# Altium PCB PCB 0817.PcbDoc (part 1 of 2)
Units mil, origin at the board's own origin, x right, y up, seen from the top; angles counter-clockwise.
Board outline 9370 x 8640 mil, 2 copper layers (Top Layer, Bottom Layer); 60 components, 203 nets, 811 pads, 245 vias.
Unrouted connection lines stored in the file: 129.
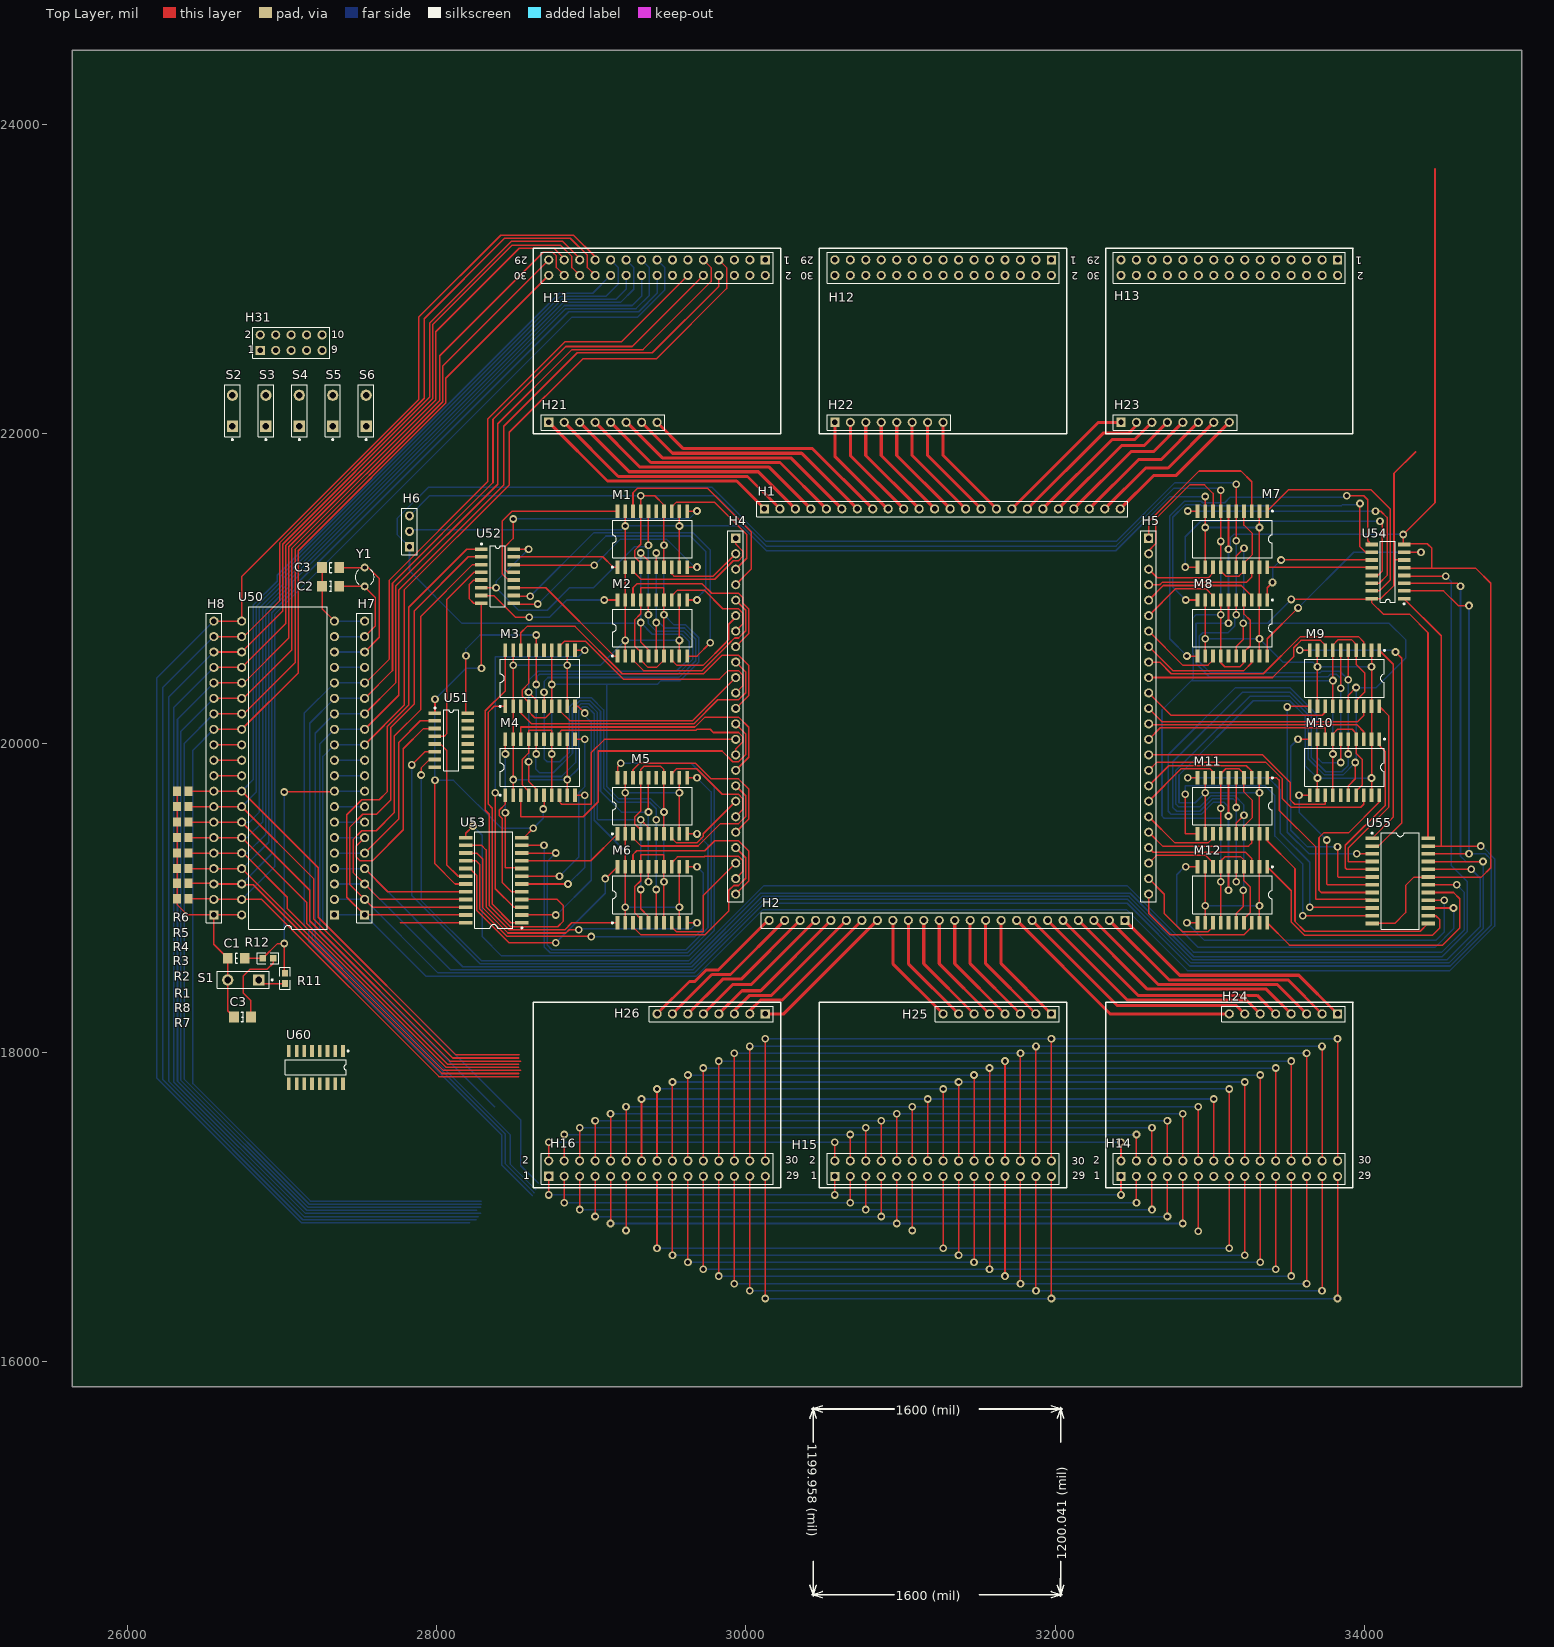
[diagram p0: Top Layer view]
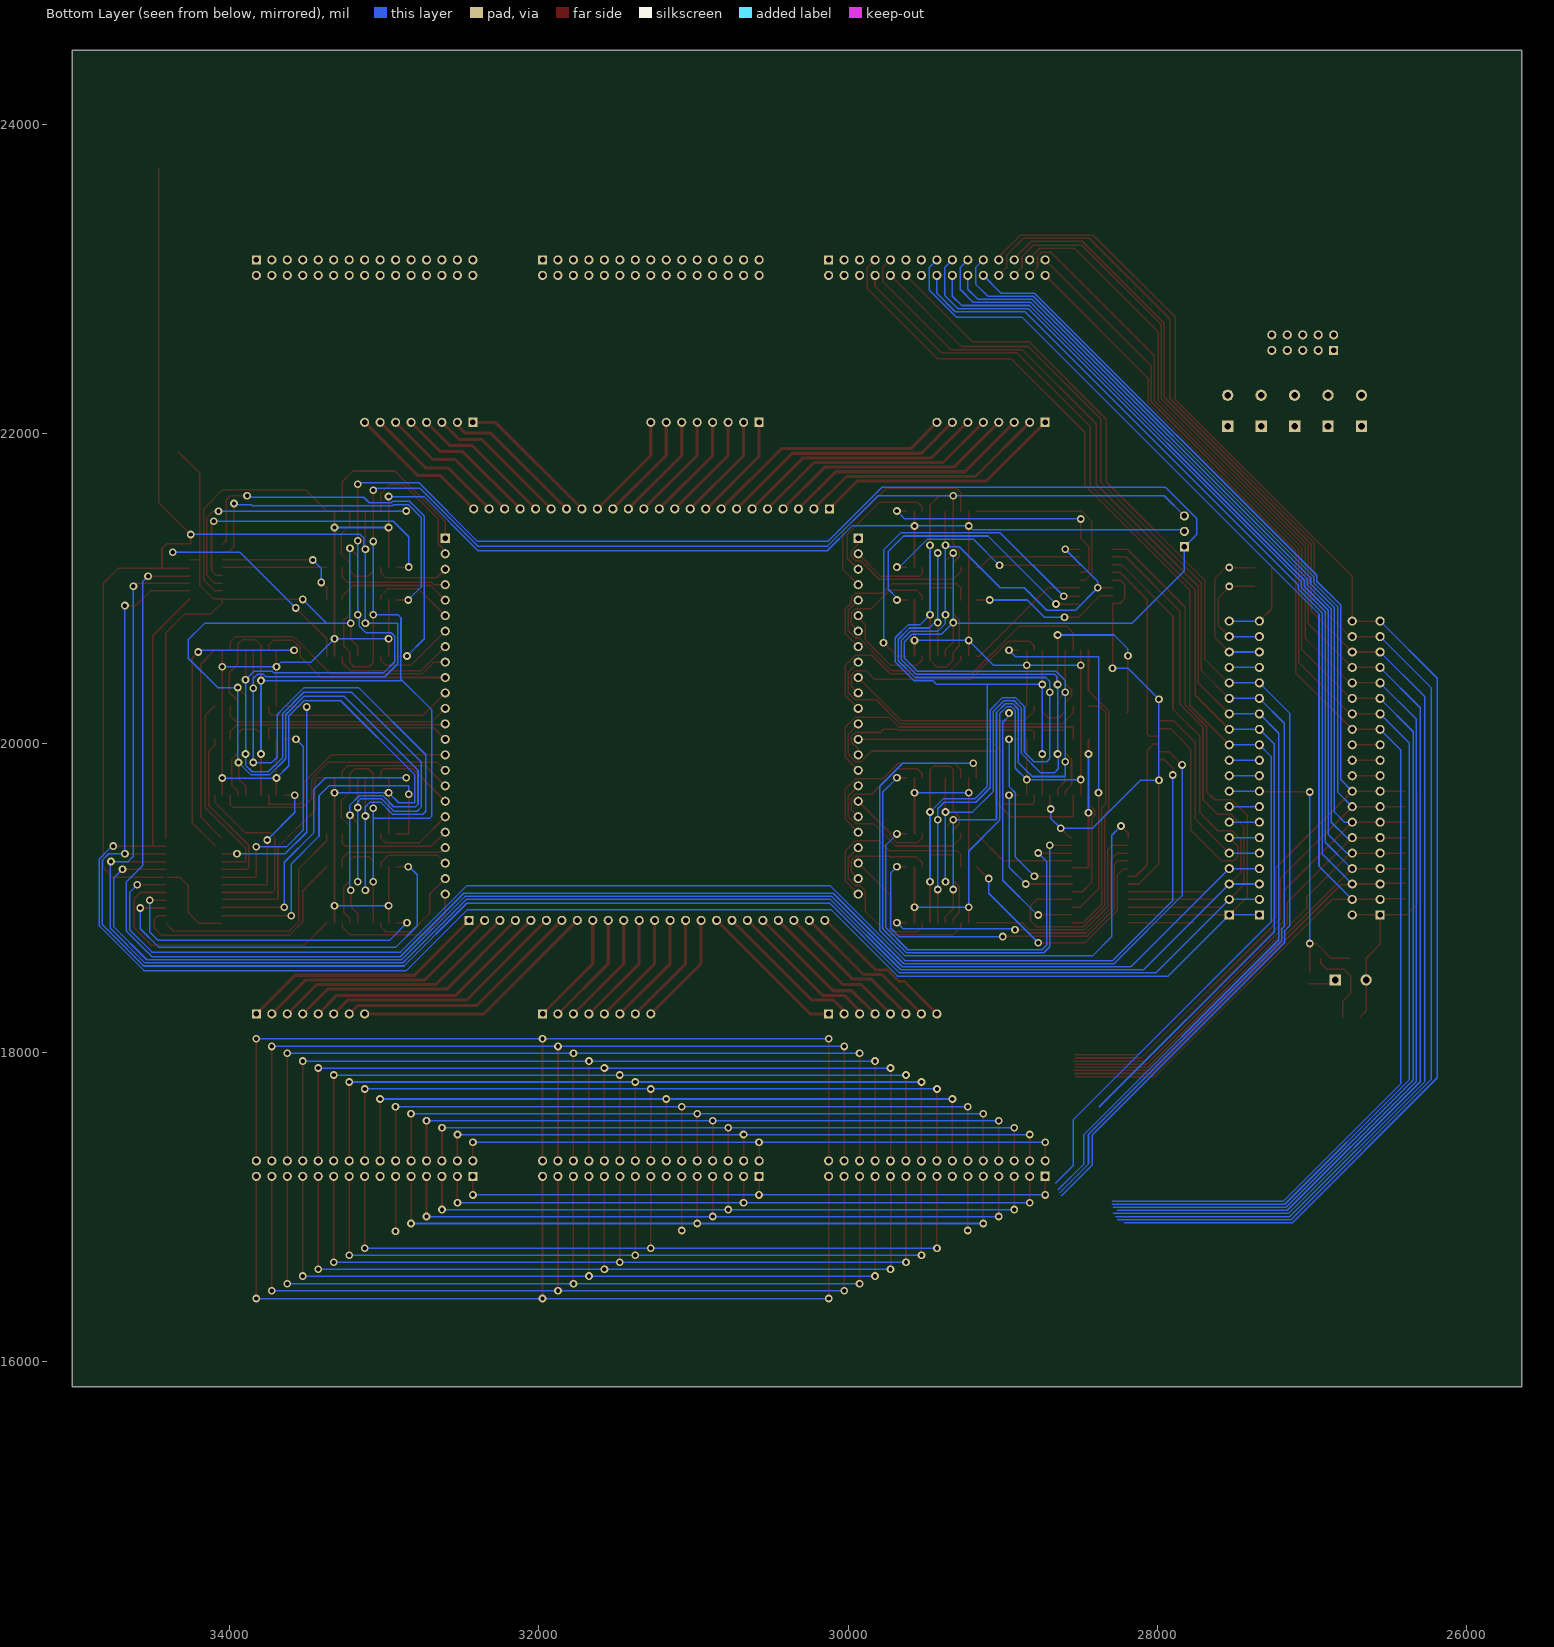
[diagram p1: Bottom Layer view, seen from below]

## Layer stack, top to bottom
Top Layer: signal copper 1.4
Dielectric: dielectric 12.6, FR-4, Dk 4.8
Bottom Layer: signal copper 1.4

## Board outline
25645,15840 25645,24480 35015,24480 35015,15840

## Design rules (kind name [scope] priority, off if disabled: settings)
Clearance Clearance_1 [All] p1: gap=10
Clearance [All] p2: gap=10
PolygonConnect [All] p1: connectstyle=Relief reliefconductorwidth=10 reliefentries=4 polygonreliefangle="90 Angle"
RoutingVias [All] p1: holewidth=28 width=50 viastyle="Through Hole" minholewidth=28 minwidth=50 maxholewidth=28 maxwidth=50
SilkscreenOverComponentPads [All] p1: minsilkscreentomaskgap=10
SolderMaskExpansion [All] p1: expansion=4
Width [All] p1: maxlimit=49.37 minlimit=10 preferedwidth=10
27 further rules are at their usual default settings.

## Components (designator, comment, footprint, x,y, rotation, side; value= is the part's Value field where it differs from the comment)
C1 "Cap Semi" CC3216-1206 26704.88,18610 r0 top
C2 "Cap Semi" CC3216-1206 27315,21015 r180 top
C3 "Cap Semi" CC3216-1206 26745,18230 r180 top
C3 "Cap Semi" CC3216-1206 27315,21135 r0 top
H1 "Header 24" HDR1X24 30120,21515 r0 top
H2 "Header 24" HDR1X24 32450,18855 r180 top
H4 "Header 24" HDR1X24 29933.9,21325 r270 top
H5 "Header 24" HDR1X24 32603.9,21325 r270 top
H6 "Header 3" HDR1X3 27825,21270 r90 top
H7 "Header 20" HDR1X20 27535,18890 r90 top
H8 "Header 20" HDR1X20 26560,18890 r90 top
H11 "Header 15X2" HDR2X15 30125.33,23124.96 r180 top
H12 "Header 15X2" HDR2X15 31975,23124.96 r180 top
H13 "Header 15X2" HDR2X15 33825,23125 r180 top
H14 "Header 15X2" HDR2X15 32425,17200 r0 top
H15 "Header 15X2" HDR2X15 30575,17200 r0 top
H16 "Header 15X2" HDR2X15 28725.25,17200.25 r0 top
H21 "Header 8" HDR1X8 28725.33,22074.96 r0 top
H22 "Header 8" HDR1X8 30575,22074.96 r0 top
H23 "Header 8" HDR1X8 32425,22075 r0 top
H24 "Header 8" HDR1X8 33825,18250 r180 top
H25 "Header 8" HDR1X8 31975,18250 r180 top
H26 "Header 8" HDR1X8 30125.25,18250.25 r180 top
H31 "Header 5X2" HDR2X5 26860,22540 r0 top
M1 "MAX333ACWP" WSO20 29395,21320 r0 top
M2 "MAX333ACWP" WSO20 29395,20745 r0 top
M3 "MAX333ACWP" WSO20 28670,20420 r0 top
M4 "MAX333ACWP" WSO20 28670,19845 r0 top
M5 "MAX333ACWP" WSO20 29395,19595 r0 top
M6 "MAX333ACWP" WSO20 29395,19020 r0 top
M7 "MAX333ACWP" WSO20 33145,21320 r180 top
M8 "MAX333ACWP" WSO20 33145,20745 r180 top
M9 "MAX333ACWP" WSO20 33870,20420 r180 top
M10 "MAX333ACWP" WSO20 33870,19845 r180 top
M11 "MAX333ACWP" WSO20 33145,19595 r180 top
M12 "MAX333ACWP" WSO20 33145,19020 r180 top
R1 "Res Semi" CR2012-0805 26360,18995 r0 top
R2 "Res Semi" CR2012-0805 26360,19095 r0 top
R3 "Res Semi" CR2012-0805 26360,19190 r0 top
R4 "Res Semi" CR2012-0805 26360,19290 r0 top
R5 "Res Semi" CR2012-0805 26360,19390 r0 top
R6 "Res Semi" CR2012-0805 26360,19490 r0 top
R7 "Res Semi" CR2012-0805 26360,19590 r0 top
R8 "Res Semi" CR2012-0805 26360,19690 r0 top
R11 "Res3" C1608-0603 27020,18480 r90 top
R12 "Res3" C1608-0603 26910,18610 r180 top
S1 "SW-PB" SPST-2 26750,18470 r180 top
S2 "SW-PB" SPST-2 26680,22150 r90 top
S3 "SW-PB" SPST-2 26896.25,22150 r90 top
S4 "SW-PB" SPST-2 27112.5,22150 r90 top
S5 "SW-PB" SPST-2 27328.75,22150 r90 top
S6 "SW-PB" SPST-2 27545,22150 r90 top
U50 "AT89C51" 40P6 27040,19840 r90 top
U51 "SN74AHC139D" D016 28095,20020 r270 top
U52 "SN74F138D" D016 28395,21080 r270 top
U53 "DM74LS154WM" M24B 28370,19115 r90 top
U54 "SN74F138D" D016 34150,21110 r90 top
U55 "DM74LS154WM" M24B 34230,19110 r270 top
U60 "SN74F138D" D016 27220,17905 r180 top
Y1 "XTAL" BCY-W2/D3.1 27535,21075 r0 top

## Footprints (in the part's own frame and the unit in brackets; to place one, negate y for a bottom-side part, rotate by r counter-clockwise, add the part's x,y. Pads: shape width x height; smd on the part's side, far side on the other; paste and mask are expansions set on the pad)
40P6 [mm]
  rect 1.5x1.5 hole 0.9: 1(-24.13,-7.62)
  round 1.5 hole 0.9: 2(-21.59,-7.62) 3(-19.05,-7.62) 4(-16.51,-7.62) 5(-13.97,-7.62) 6(-11.43,-7.62) 7(-8.89,-7.62) 8(-6.35,-7.62) 9(-3.81,-7.62) 10(-1.27,-7.62) 11(1.27,-7.62) 12(3.81,-7.62) 13(6.35,-7.62) 14(8.89,-7.62) 15(11.43,-7.62) 16(13.97,-7.62) 17(16.51,-7.62) 18(19.05,-7.62) 19(21.59,-7.62) 20(24.13,-7.62) 21(24.13,7.62) 22(21.59,7.62) 23(19.05,7.62) 24(16.51,7.62) 25(13.97,7.62) 26(11.43,7.62) 27(8.89,7.62) 28(6.35,7.62) 29(3.81,7.62) 30(1.27,7.62) 31(-1.27,7.62) 32(-3.81,7.62) 33(-6.35,7.62) 34(-8.89,7.62) 35(-11.43,7.62) 36(-13.97,7.62) 37(-16.51,7.62) 38(-19.05,7.62) 39(-21.59,7.62) 40(-24.13,7.62)
  silkscreen extent -26.5,-6.45 26.5,6.45
BCY-W2/D3.1 [mm] "Crystal, Thru-Hole; 2 Leads; Body 3.1 x 8.2 mm (Dia.xH)"
  round 1.3 hole 0.7: 1(0,1.55) 2(0,-1.55)
  silkscreen extent -1.55,-1.19 1.55,1.17
C1608-0603 [mm] "Chip Resistor; Body 1.6 x 0.8 mm (LxW typ)"
  rect 1.1x1 smd: 1(-0.85,0) 2(0.85,0)
  silkscreen extent -1.8,-0.9 1.8,0.9
CC3216-1206 [mm] "Chip Capacitor; Body 3.2 x 1.6 mm (LxW typ)"
  rect 1.6x1.8 smd: 1(-1.4,0) 2(1.4,0)
  silkscreen extent -0.11,-0.8 0.16,0.8
CR2012-0805 [mm] "Chip Resistor; Body 2.0 x 1.3 mm (LxW typ)"
  rect 1.3x1.5 smd: 1(-0.95,0) 2(0.95,0)
D016 [mm] "Small Outline; 16 Leads; Body Width 3.9 mm; Pitch 1.27 mm"
  rect 0.6x2.05 smd: 1(-4.445,-2.675) 2(-3.175,-2.675) 3(-1.905,-2.675) 4(-0.635,-2.675) 5(0.635,-2.675) 6(1.905,-2.675) 7(3.175,-2.675) 8(4.445,-2.675) 9(4.445,2.675) 10(3.175,2.675) 11(1.905,2.675) 12(0.635,2.675) 13(-0.635,2.675) 14(-1.905,2.675) 15(-3.175,2.675) 16(-4.445,2.675)
  silkscreen extent -5.42,-2.8 5,1.25
HDR1X3 [mm] "Connector; Header; 3 Position"
  rect 1.5x1.5 hole 0.9: 1(0,0)
  round 1.5 hole 0.9: 2(2.54,0) 3(5.08,0)
  silkscreen extent -1.27,-1.27 6.35,1.27
HDR1X8 [mm] "Connector; Header; 8 Position"
  rect 1.5x1.5 hole 0.9: 1(0,0)
  round 1.5 hole 0.9: 2(2.54,0) 3(5.08,0) 4(7.62,0) 5(10.16,0) 6(12.7,0) 7(15.24,0) 8(17.78,0)
  silkscreen extent -1.27,-1.27 19.05,1.27
HDR1X20 [mm] "Connector; Header; 20 Position"
  rect 1.5x1.5 hole 0.9: 1(0,0)
  round 1.5 hole 0.9: 2(2.54,0) 3(5.08,0) 4(7.62,0) 5(10.16,0) 6(12.7,0) 7(15.24,0) 8(17.78,0) 9(20.32,0) 10(22.86,0) 11(25.4,0) 12(27.94,0) 13(30.48,0) 14(33.02,0) 15(35.56,0) 16(38.1,0) 17(40.64,0) 18(43.18,0) 19(45.72,0) 20(48.26,0)
  silkscreen extent -1.27,-1.27 49.53,1.27
HDR1X24 [mm] "Connector; Header; 24 Position"
  rect 1.5x1.5 hole 0.9: 1(0,0)
  round 1.5 hole 0.9: 2(2.54,0) 3(5.08,0) 4(7.62,0) 5(10.16,0) 6(12.7,0) 7(15.24,0) 8(17.78,0) 9(20.32,0) 10(22.86,0) 11(25.4,0) 12(27.94,0) 13(30.48,0) 14(33.02,0) 15(35.56,0) 16(38.1,0) 17(40.64,0) 18(43.18,0) 19(45.72,0) 20(48.26,0) 21(50.8,0) 22(53.34,0) 23(55.88,0) 24(58.42,0)
  silkscreen extent -1.27,-1.27 59.69,1.27
HDR2X5 [mm] "Connector; Header; 5x2 Position"
  rect 1.5x1.5 hole 0.9: 1(0,0)
  round 1.5 hole 0.9: 2(0,2.54) 3(2.54,0) 4(2.54,2.54) 5(5.08,0) 6(5.08,2.54) 7(7.62,0) 8(7.62,2.54) 9(10.16,0) 10(10.16,2.54)
  silkscreen extent -1.27,-1.27 11.43,3.81
HDR2X15 [mm] "Connector; Header; 15x2 Position"
  rect 1.5x1.5 hole 0.9: 1(0,0)
  round 1.5 hole 0.9: 2(0,2.54) 3(2.54,0) 4(2.54,2.54) 5(5.08,0) 6(5.08,2.54) 7(7.62,0) 8(7.62,2.54) 9(10.16,0) 10(10.16,2.54) 11(12.7,0) 12(12.7,2.54) 13(15.24,0) 14(15.24,2.54) 15(17.78,0) 16(17.78,2.54) 17(20.32,0) 18(20.32,2.54) 19(22.86,0) 20(22.86,2.54) 21(25.4,0) 22(25.4,2.54) 23(27.94,0) 24(27.94,2.54) 25(30.48,0) 26(30.48,2.54) 27(33.02,0) 28(33.02,2.54) 29(35.56,0) 30(35.56,2.54)
  silkscreen extent -1.27,-1.27 36.83,3.81
M24B [mm] "Small Outline; 24 Leads; Body Width 7.5 mm; Pitch 1.27 mm"
  rect 0.6x2.2 smd: 1(-6.985,-4.6) 2(-5.715,-4.6) 3(-4.445,-4.6) 4(-3.175,-4.6) 5(-1.905,-4.6) 6(-0.635,-4.6) 7(0.635,-4.6) 8(1.905,-4.6) 9(3.175,-4.6) 10(4.445,-4.6) 11(5.715,-4.6) 12(6.985,-4.6) 13(6.985,4.6) 14(5.715,4.6) 15(4.445,4.6) 16(3.175,4.6) 17(1.905,4.6) 18(0.635,4.6) 19(-0.635,4.6) 20(-1.905,4.6) 21(-3.175,4.6) 22(-4.445,4.6) 23(-5.715,4.6) 24(-6.985,4.6)
  silkscreen extent -7.96,-4.73 7.93,3.1
SPST-2 [mm] "Circuit Breaker; 2 Leads"
  rect 1.85x1.85 hole 1.1: 1(-2.54,0)
  round 1.85 hole 1.1: 2(2.54,0)
  silkscreen extent -4.89,-1.4 4.28,1.4
WSO20 [mm] "Small Outline; 20 Leads; Body Width 7.5 mm; Pitch 1.27 mm"
  rect 0.6x2.2 smd: 1(-5.715,-4.6) 2(-4.445,-4.6) 3(-3.175,-4.6) 4(-1.905,-4.6) 5(-0.635,-4.6) 6(0.635,-4.6) 7(1.905,-4.6) 8(3.175,-4.6) 9(4.445,-4.6) 10(5.715,-4.6) 11(5.715,4.6) 12(4.445,4.6) 13(3.175,4.6) 14(1.905,4.6) 15(0.635,4.6) 16(-0.635,4.6) 17(-1.905,4.6) 18(-3.175,4.6) 19(-4.445,4.6) 20(-5.715,4.6)
  silkscreen extent -6.69,-4.72 6.53,3.1

## Part data
C1 C2 C3 C3: "Capacitor (Semiconductor SIM Model)"
H1 H2 H4 H5: "Header, 24-Pin"
H6: "Header, 3-Pin"
H7 H8: "Header, 20-Pin"
H11 H12 H13 H14 H15 H16: "Header, 15-Pin, Dual row"
H21 H22 H23 H24 H25 H26: "Header, 8-Pin"
H31: "Header, 5-Pin, Dual row"
M1 M2 M3 M4 M5 M6 M7 M8 M9 M10 M11 M12: "Precision, Quad, SPDT, CMOS Analog Switch"
R1 R2 R3 R4 R5 R6 R7 R8: "Semiconductor Resistor"
R11 R12: "Resistor"
S1 S2 S3 S4 S5 S6: "Switch"
U50: "8-Bit Microcontroller with 4K Fla"
U51: "Dual 2-Line to 4-Line Decoder / Demultiplexer"
U52 U54 U60: "3-Line to 8-Line Decoder / Demultiplexer"
U53 U55: "4-Line to 16-Line Decoder/Demultiplexer"
Y1: "Crystal Oscillator"

## Via types
v1: diameter 50, hole 28, Top Layer to Bottom Layer, 245 vias

## Nets (pads, with @x,y where several pads share a name; then routed paths per layer and width w, separated by ;. In a path a pad name is that pad's centre, name@x,y a point inside that pad or via, vN(x,y) a via of type N, cw(c..) or ccw(c..) an arc to the next point about the centre after c; other vN are vias at no path point)
CS1: H11.11 U60.14
CS2: H12.11 U60.13
CS3: H13.11 U60.12
CS4: H14.11 U60.10 | length 350
  Top Layer w10: v1(32925,16845) H14.11@32925,17195
CS5: H15.11 U60.9 | length 350
  Top Layer w10: v1(31075,16850) H15.11@31075,17200
CS6: H16.11 U60.7 | length 350
  Top Layer w10: v1(29225,16850) H16.11@29225,17200
FRST: H11.14 H12.14 H13.14 H14.14 H15.14 H16.14 H31.9 S6.2 | length 4914.1
  Top Layer w10: H16.14@29325,17300 v1(29325,17700) ; H15.14@31175,17300 v1(31175,17700) ; H14.14@33025,17300 v1(33025,17700)
  Bottom Layer w10: v1@29330,17705 v1(29325,17700) v1(33025,17700) v1@33030,17705
GND: C2.2 C3.1 H7.20 H11.2 H12.2 H13.2 H14.2 H15.2 H16.2 H31.6 H31.8 H31.10 M1.6 M2.6 M3.6 M4.6 M5.6 M6.6 M7.6 M8.6 M9.6 M10.6 M11.6 M12.6 R12.1 S2.1 S3.1 S4.1 S5.1 S6.1 U50.20 U51.1 U51.8 U52.5 U52.8 U53.12 U53.19 U54.5 U54.8 U55.12 U55.19 U60.4 U60.5 U60.8 | length 28157.7
  Top Layer w10: C3.1@26800.12,18230 26800.12,18334.88 26750,18385 26750,18495 26795,18540 26905.43,18540 26943.46,18578.03 R12.1@26943.46,18610 ; C3.1@27259.88,21135 C2.2@27259.88,21015 27260,21014.88 27260,20870 U50.20@27340,20790 ; v1(27989.69,19760) 27989.69,19220.31 28120,19090 U53.19@28188.9,19090 ; U51.1@27990,20195.31 v1(27990,20285) ; v1@28289.69,20485.31 U52.8@28289.69,20905 28240,20905 28210,20935 28210,21025 28240,21055 U52.5@28289.69,21055 ; U53.12@28551.1,19390 28565,19390 v1(28625,19450) ; v1@28695,19580 M4.6@28695,19663.9 ; M3.6@28695,20238.9 v1(28695,20330) ; H16.2@28725,17300 v1(28725,17420) ; M6.6@29420,18838.9 v1(29420,19055) ; M2.6@29420,20563.9 v1(29420,20780) ; M1.6@29420,21138.9 v1(29420,21230) ; H15.2@30575,17300 v1(30575,17420) ; H14.2@32425,17300 v1(32425,17420) ; v1(33120,19050) M12.6@33120,19201.1 ; v1(33120,19530) 33120,19535 33117.5,19537.5 33120,19540 M11.6@33120,19776.1 ; v1(33120,20775) M8.6@33120,20926.1 ; v1(33120,21255) 33120,21260 33117.5,21262.5 33120,21265 M7.6@33120,21501.1 ; v1(33845,19875) M10.6@33845,20026.1 ; v1(33845,20355) 33845,20360 33842.5,20362.5 33845,20365 M9.6@33845,20601.1 ; U55.12@34048.9,18835 34195,18835 34265,18905 34265,19080 34320,19135 U55.19@34399.84,19135 ; U54.5@34260,21130.31 34435,21130.31 ; U55.19@34425,19135 34755,19135 34815,19195 34815,21035 34719.69,21130.31 34435,21130.31 ; 34455,23715 34455,21555 v1(34250,21350) 34250,21290.31 34404.69,21290.31 34435,21260 34435,21130.31
  Bottom Layer w10: U50.20@27340,20790 H7.20@27535,20790 ; v1(28290,20485) 28190,20485 v1(27990,20285) 27989.69,20284.69 v1(27989.69,19760) 28110,19760 28420,19450 v1(28625,19450) 28690,19515 v1(28690,19575) ; v1(28725,17420) v1(32425,17420) ; v1(29420,19055) v1(29420,19505) 29420,19576.72 29378.36,19618.36 29173.36,19618.36 29080,19711.72 29080,20215.32 29000.32,20295 28917.48,20295 28858.9,20236.42 28858.9,19942.18 28796.72,19880 28715,19880 28695,19900 v1(28695,20330) 28695,20400 28720,20425 29566.57,20425 29675,20533.43 29675,20673.14 29603.14,20745 29475,20745 29440,20780 v1(29420,20780) v1(29420,21230) ; v1(33120,19050) v1(33120,19530) 33120,19590 33090,19620 33023.14,19620 32943.14,19540 32750,19540 32730,19560 32730,19925 33165,20360 33516.42,20360 33675,20201.42 33675,20200 33690,20185 33690,19910 33725,19875 v1(33845,19875) v1(33845,20355) 33845,20420 33820,20445 33778.43,20445 33763.43,20430 32995,20430 32911.1,20513.9 32911.1,20588.75 32910,20589.85 32910,20775 v1(33120,20775) v1(33120,21255) ; v1@33120,21265 v1(33120,21255) ; v1(34250,21350) 33153.43,21350 33130,21326.57 33130,21265 v1(33120,21255)
IN1: H1.1 H21.1 | length 1626.6
  Top Layer w20: H21.1@28725.33,22074.96 29105.29,21695 29940,21695 H1.1@30120,21515
IN2: H1.2 H21.2 | length 1626.6
  Top Layer w20: H21.2@28825.33,22074.96 29175.29,21725 30010,21725 H1.2@30220,21515
IN3: H1.3 H21.3 | length 1626.6
  Top Layer w20: H21.3@28925.33,22074.96 29245.29,21755 30080,21755 H1.3@30320,21515
IN4: H1.4 H21.4 | length 1626.6
  Top Layer w20: H21.4@29025.33,22074.96 29315.29,21785 30150,21785 H1.4@30420,21515
IN5: H1.5 H21.5 | length 1626.6
  Top Layer w20: H21.5@29125.33,22074.96 29385.29,21815 30220,21815 H1.5@30520,21515
IN6: H1.6 H21.6 | length 1626.6
  Top Layer w20: H21.6@29225.33,22074.96 29230.04,22074.96 29460,21845 30290,21845 H1.6@30620,21515
IN7: H1.7 H21.7 | length 1626.6
  Top Layer w20: H21.7@29325.33,22074.96 29525.29,21875 30360,21875 H1.7@30720,21515
IN8: H1.8 H21.8 | length 1626.6
  Top Layer w20: H21.8@29425.33,22074.96 29595.29,21905 30430,21905 H1.8@30820,21515
IN9: H1.9 H22.1 | length 694.6
  Top Layer w20: H22.1@30575,22074.96 30575,21855 30900,21530 H1.9@30900,21515
IN10: H1.10 H22.2 | length 702.9
  Top Layer w20: H22.2@30675,22074.96 30675,21860 H1.10@31020,21515
IN11: H1.11 H22.3 | length 702.9
  Top Layer w20: H22.3@30775,22074.96 30775,21860 H1.11@31120,21515
IN12: H1.12 H22.4 | length 702.9
  Top Layer w20: H22.4@30875,22074.96 30875,21860 H1.12@31220,21515
IN13: H1.13 H22.5 | length 702.9
  Top Layer w20: H22.5@30975,22074.96 30975,21860 H1.13@31320,21515
IN14: H1.14 H22.6 | length 702.9
  Top Layer w20: H22.6@31075,22074.96 31075,21860 H1.14@31420,21515
IN15: H1.15 H22.7 | length 702.9
  Top Layer w20: H22.7@31175,22074.96 31175,21860 H1.15@31520,21515
IN16: H1.16 H22.8 | length 702.9
  Top Layer w20: H22.8@31275,22074.96 31275,21860 H1.16@31620,21515
IN17: H1.17 H23.1 | length 937
  Top Layer w20: H1.17@31720,21515 32280,22075 H23.1@32425,22075
IN18: H1.18 H23.2 | length 948.7
  Top Layer w20: H1.18@31820,21515 32310,22005 32475,22005 32525,22055 H23.2@32525,22075
IN19: H1.19 H23.3 | length 937
  Top Layer w20: H1.19@31920,21515 32370,21965 32515,21965 H23.3@32625,22075
IN20: H1.20 H23.4 | length 937
  Top Layer w20: H1.20@32020,21515 32430,21925 32575,21925 H23.4@32725,22075
IN21: H1.21 H23.5 | length 937
  Top Layer w20: H1.21@32120,21515 32490,21885 32635,21885 H23.5@32825,22075
IN22: H1.22 H23.6 | length 937
  Top Layer w20: H1.22@32220,21515 32540,21835 32685,21835 H23.6@32925,22075
IN23: H1.23 H23.7 | length 937
  Top Layer w20: H1.23@32320,21515 32585,21780 32730,21780 H23.7@33025,22075
IN24: H1.24 H23.8 | length 937
  Top Layer w20: H1.24@32420,21515 32635,21730 32780,21730 H23.8@33125,22075
IN25: H2.1 H24.1 | length 1625.6
  Top Layer w20: H2.1@32450,18855 32805,18500 33575,18500 H24.1@33825,18250
IN26: H2.2 H24.2 | length 1625.6
  Top Layer w20: H2.2@32350,18855 32735,18470 33505,18470 H24.2@33725,18250
IN27: H2.3 H24.3 | length 1625.6
  Top Layer w20: H2.3@32250,18855 32665,18440 33435,18440 H24.3@33625,18250
IN28: H2.4 H24.4 | length 1625.6
  Top Layer w20: H2.4@32150,18855 32595,18410 33365,18410 H24.4@33525,18250
IN29: H2.5 H24.5 | length 1625.6
  Top Layer w20: H2.5@32050,18855 32535,18370 33305,18370 H24.5@33425,18250
IN30: H2.6 H24.6 | length 1625.6
  Top Layer w20: H2.6@31950,18855 32465,18340 33235,18340 H24.6@33325,18250
IN31: H2.7 H24.7 | length 1625.6
  Top Layer w20: H2.7@31850,18855 32400,18305 33170,18305 H24.7@33225,18250
IN32: H2.8 H24.8 | length 1625.6
  Top Layer w20: H2.8@31750,18855 32355,18250 H24.8@33125,18250
IN33: H2.9 H25.1 | length 739.6
  Top Layer w20: H2.9@31650,18855 31650,18575 H25.1@31975,18250
IN34: H2.10 H25.2 | length 739.6
  Top Layer w20: H2.10@31550,18855 31550,18575 H25.2@31875,18250
IN35: H2.11 H25.3 | length 739.6
  Top Layer w20: H2.11@31450,18855 31450,18575 H25.3@31775,18250
IN36: H2.12 H25.4 | length 739.6
  Top Layer w20: H2.12@31350,18855 31350,18575 H25.4@31675,18250
IN37: H2.13 H25.5 | length 739.6
  Top Layer w20: H2.13@31250,18855 31250,18575 H25.5@31575,18250
IN38: H2.14 H25.6 | length 739.6
  Top Layer w20: H2.14@31150,18855 31150,18575 H25.6@31475,18250
IN39: H2.15 H25.7 | length 739.6
  Top Layer w20: H2.15@31050,18855 31050,18575 H25.7@31375,18250
IN40: H2.16 H25.8 | length 739.6
  Top Layer w20: H2.16@30950,18855 30950,18575 H25.8@31275,18250
IN41: H2.17 H26.1 | length 975.2
  Top Layer w20: H26.1@30125.25,18250.25 30245.25,18250.25 H2.17@30850,18855
IN42: H2.18 H26.2 | length 987
  Top Layer w20: H26.2@30025.25,18250.25 30025.25,18270.25 30095,18340 30235,18340 H2.18@30750,18855
IN43: H2.19 H26.3 | length 987
  Top Layer w20: H26.3@29925.25,18250.25 29925.25,18270.25 30025,18370 30165,18370 H2.19@30650,18855
IN44: H2.20 H26.4 | length 975.2
  Top Layer w20: H26.4@29825.25,18250.25 29975,18400 30095,18400 H2.20@30550,18855
IN45: H2.21 H26.5 | length 975.2
  Top Layer w20: H26.5@29725.25,18250.25 29915,18440 30035,18440 H2.21@30450,18855
IN46: H2.22 H26.6 | length 975.2
  Top Layer w20: H26.6@29625.25,18250.25 29850,18475 29970,18475 H2.22@30350,18855
IN47: H2.23 H26.7 | length 975.2
  Top Layer w20: H26.7@29525.25,18250.25 29780,18505 29900,18505 H2.23@30250,18855
IN48: H2.24 H26.8 | length 973.8
  Top Layer w20: H26.8@29425.25,18250.25 29635,18460 29670,18460 29745,18535 29822.57,18535 30145,18857.43 H2.24@30147.57,18857.43
NetH4_1: H4.1 M1.3 | length 953.6
  Top Layer w10: M1.3@29270,21138.9 29270,21112.57 29321.98,21060.59 29797.77,21060.59 29917.65,21180.47 29952.34,21180.47 29978.43,21206.56 29978.43,21243.44 29933.9,21287.97 H4.1@29933.9,21325
NetH4_2: H4.2 M1.8 | length 523.6
  Top Layer w10: M1.8@29520,21138.9 29520,21095 29534.41,21080.59 29789.49,21080.59 H4.2@29933.9,21225
NetH4_3: H4.3 M1.13 | length 865.8
  Top Layer w10: M1.13@29520,21501.1 29520,21527.43 29551.98,21559.41 29795.59,21559.41 30005,21350 30005,21196.1 H4.3@29933.9,21125
NetH4_4: H4.4 M1.18 | length 1396.3
  Top Layer w10: M1.18@29270,21501.1 29270,21620 29300,21650 29750,21650 30035,21365 30035,21126.1 H4.4@29933.9,21025
NetH4_5: H4.5 M2.3 | length 1115.6
  Top Layer w10: M2.3@29270,20563.9 29270,20537.57 29337.57,20470 29718.28,20470 29889.37,20641.09 29889.37,20643.44 29926.4,20680.47 29952.34,20680.47 29998.43,20726.56 29998.43,20860.47 H4.5@29933.9,20925
NetH4_6: H4.6 M2.8 | length 650.9
  Top Layer w10: M2.8@29520,20563.9 29520,20537.57 29551.98,20505.59 29725.59,20505.59 29869.37,20649.37 29869.37,20651.73 29889.37,20671.73 29889.37,20769.53 29933.9,20814.06 H4.6@29933.9,20825
NetH4_7: H4.7 M2.13 | length 697.9
  Top Layer w10: M2.13@29520,20926.1 29520,20952.43 29557.57,20990 29730,20990 29850.47,20869.53 29952.34,20869.53 29978.43,20843.44 29978.43,20769.53 H4.7@29933.9,20725
NetH4_8: H4.8 M2.18 | length 1203.6
  Top Layer w10: M2.18@29270,20926.1 29270,21005 29295,21030 29718.28,21030 29778.76,20969.53 29952.34,20969.53 29978.43,20943.44 29978.43,20908.76 30018.43,20868.76 30018.43,20709.53 H4.8@29933.9,20625
NetH4_9: H4.9 M3.3 | length 1835
  Top Layer w10: M3.3@28545,20238.9 28545,20195 28615,20125 29662.18,20125 29817.65,20280.47 29952.34,20280.47 29998.43,20326.56 29998.43,20460.47 H4.9@29933.9,20525
NetH4_10: H4.10 M3.8 | length 1309.2
  Top Layer w10: M3.8@28795,20238.9 28795,20212.57 28862.57,20145 29653.9,20145 H4.10@29933.9,20425
NetH4_11: H4.11 M3.13 | length 1494.5
  Top Layer w10: M3.13@28795,20601.1 28795,20627.43 28826.98,20659.41 28962.31,20659.41 29206.72,20415 29829.76,20415 29884.28,20469.53 29952.34,20469.53 29978.43,20443.44 29978.43,20369.53 H4.11@29933.9,20325
NetH4_12: H4.12 M3.18 | length 2120.6
  Top Layer w10: M3.18@28545,20601.1 28545,20715 28585,20755 28895,20755 29200,20450 29726.57,20450 29846.1,20569.53 29952.34,20569.53 30018.43,20503.44 30018.43,20309.53 H4.12@29933.9,20225
NetH4_13: H4.13 M4.3 | length 2233.7
  Top Layer w10: M4.3@28545,19663.9 28545,19525 28948.28,19525 29045,19621.72 29045,19950 29845.93,19950 29915.45,19880.47 29952.34,19880.47 29998.43,19926.56 29998.43,20060.47 H4.13@29933.9,20125
NetH4_14: H4.14 M4.8 | length 1558.7
  Top Layer w10: M4.8@28795,19663.9 28795,19620 28809.41,19605.59 29000.59,19605.59 29000.59,19940.59 29085,20025 H4.14@29933.9,20025
NetH4_15: H4.15 M4.13 | length 1391.8
  Top Layer w10: M4.13@28795,20026.1 28795,20070 28810,20085 29678.75,20085 29683.75,20090 29768.9,20090 29789.37,20069.53 29952.34,20069.53 29978.43,20043.44 29978.43,20006.56 29933.9,19962.03 H4.15@29933.9,19925
NetH4_16: H4.16 M4.18 | length 1919.9
  Top Layer w10: M4.18@28545,20026.1 28545,20105 29670.47,20105 29734.99,20169.53 29952.34,20169.53 30018.43,20103.44 30018.43,19909.53 H4.16@29933.9,19825
NetH4_17: H4.17 M5.3 | length 1080.6
  Top Layer w10: M5.3@29270,19413.9 29270,19387.57 29321.98,19335.59 29690.44,19335.59 29835.33,19480.47 29952.34,19480.47 29998.43,19526.56 29998.43,19660.47 H4.17@29933.9,19725
NetH4_18: H4.18 M5.8 | length 575.4
  Top Layer w10: M5.8@29520,19413.9 29520,19387.57 29551.98,19355.59 29682.16,19355.59 29723.9,19397.33 29723.9,19415 H4.18@29933.9,19625
NetH4_19: H4.19 M5.13 | length 714
  Top Layer w10: M5.13@29520,19776.1 29520,19802.43 29551.98,19834.41 29682.16,19834.41 29847.04,19669.53 29952.34,19669.53 29978.43,19643.44 29978.43,19569.53 H4.19@29933.9,19525
NetH4_20: H4.20 M5.18 | length 1200.3
  Top Layer w10: M5.18@29270,19776.1 29270,19828.28 29311.72,19870 29674.85,19870 29775.33,19769.53 29952.34,19769.53 30018.43,19703.44 30018.43,19509.53 H4.20@29933.9,19425
NetH4_21: H4.21 M6.3 | length 1230.9
  Top Layer w10: M6.3@29270,18838.9 29270,18812.57 29321.98,18760.59 29733.88,18760.59 29889.37,18916.09 29889.37,19049.07 29920.77,19080.47 29952.34,19080.47 29998.43,19126.56 29998.43,19260.47 H4.21@29933.9,19325
NetH4_22: H4.22 M6.8 | length 775.9
  Top Layer w10: M6.8@29520,18838.9 29520,18812.57 29551.98,18780.59 29725.59,18780.59 29725.59,19016.69 H4.22@29933.9,19225
NetH4_23: H4.23 M6.13 | length 649.9
  Top Layer w10: M6.13@29520,19201.1 29520,19227.43 29557.57,19265 29730,19265 29734.53,19269.53 29952.34,19269.53 29978.43,19243.44 29978.43,19169.53 H4.23@29933.9,19125
NetH4_24: H4.24 M6.18 | length 1205.2
  Top Layer w10: M6.18@29270,19201.1 29270,19280 29295,19305 29733.76,19305 29798.28,19369.53 29952.34,19369.53 30018.43,19303.44 30018.43,19109.53 H4.24@29933.9,19025
NetH5_1: H5.1 M7.3 | length 1128
  Top Layer w10: H5.1@32603.9,21325 32603.9,21433.9 32930,21760 33200,21760 33270,21690 M7.3@33270,21501.1
NetH5_2: H5.2 M7.8 | length 842.9
  Top Layer w10: H5.2@32603.9,21225 32603.9,21244.73 32648.43,21289.26 32648.43,21450.14 32868.28,21670 32965,21670 33020,21615 M7.8@33020,21501.1
NetH5_3: H5.3 M7.13 | length 490.2
  Top Layer w10: H5.3@32603.9,21125 32658.9,21070 32990,21070 33020,21100 M7.13@33020,21138.9
NetH5_4: H5.4 M7.18 | length 750.7
  Top Layer w10: H5.4@32603.9,21025 32675.61,21025 32690.61,21040 33235,21040 33270,21075 M7.18@33270,21138.9
NetH5_5: H5.5 M8.3 | length 759.8
  Top Layer w10: H5.5@32603.9,20925 32698.9,21020 33202.43,21020 33270,20952.43 M8.3@33270,20926.1
NetH5_6: H5.6 M8.8 | length 534.6
  Top Layer w10: H5.6@32603.9,20825 32778.9,21000 32972.43,21000 33020,20952.43 M8.8@33020,20926.1
NetH5_7: H5.7 M8.13 | length 546.6
  Top Layer w10: H5.7@32603.9,20725 32823.31,20505.59 32988.02,20505.59 33020,20537.57 M8.13@33020,20563.9
NetH5_8: H5.8 M8.18 | length 794.9
  Top Layer w10: H5.8@32603.9,20625 32758.9,20470 33220,20470 33270,20520 M8.18@33270,20563.9
NetH5_9: H5.9 M9.3 | length 1590
  Top Layer w10: H5.9@32603.9,20525 32675.61,20525 32750.61,20450 33345.15,20450 33585.15,20690 33960,20690 33995,20655 M9.3@33995,20601.1
NetH5_10: H5.10 M9.8 | length 1320
  Top Layer w10: H5.10@32603.9,20425 33405,20425 33541.1,20561.1 33541.1,20617.67 33588.43,20665 33715,20665 33745,20635 M9.8@33745,20601.1
NetH5_11: H5.11 M9.13 | length 1247.9
  Top Layer w10: H5.11@32603.9,20325 32748.31,20180.59 33725.59,20180.59 33745,20200 M9.13@33745,20238.9
NetH5_12: H5.12 M9.18 | length 1501.8
  Top Layer w10: H5.12@32603.9,20225 32688.9,20140 33955,20140 33995,20180 M9.18@33995,20238.9
NetH5_13: H5.13 M10.3 | length 1460.7
  Top Layer w10: H5.13@32603.9,20125 32608.9,20120 33950,20120 33995,20075 M10.3@33995,20026.1
NetH5_14: H5.14 M10.8 | length 1246.1
  Top Layer w10: H5.14@32603.9,20025 32678.9,20100 33745,20100 M10.8@33745,20026.1
NetH5_15: H5.15 M10.13 | length 1396.8
  Top Layer w10: H5.15@32603.9,19925 33340,19925 33520,19745 33520,19633.9 33548.31,19605.59 33745,19605.59 M10.13@33745,19663.9
NetH5_16: H5.16 M10.18 | length 1675.6
  Top Layer w10: H5.16@32603.9,19825 32657.21,19878.31 33358.41,19878.31 33468.31,19768.41 33468.31,19641.69 33524.41,19585.59 33975.59,19585.59 33995,19605 M10.18@33995,19663.9
NetH5_17: H5.17 M11.3 | length 778.3
  Top Layer w10: H5.17@32603.9,19725 32733.9,19855 33235,19855 33270,19820 M11.3@33270,19776.1
NetH5_18: H5.18 M11.8 | length 549.8
  Top Layer w10: H5.18@32603.9,19625 32813.31,19834.41 33000.59,19834.41 33020,19815 M11.8@33020,19776.1
NetH5_19: H5.19 M11.13 | length 525.8
  Top Layer w10: H5.19@32603.9,19525 32773.31,19355.59 32988.02,19355.59 33020,19387.57 M11.13@33020,19413.9
NetH5_20: H5.20 M11.18 | length 770.6
  Top Layer w10: H5.20@32603.9,19425 32693.9,19335 33250,19335 33270,19355 M11.18@33270,19413.9
NetH5_21: H5.21 M12.3 | length 749
  Top Layer w10: H5.21@32603.9,19325 32633.9,19295 33230,19295 33270,19255 M12.3@33270,19201.1
NetH5_22: H5.22 M12.8 | length 482.8
  Top Layer w10: H5.22@32603.9,19225 32653.9,19275 32972.43,19275 33020,19227.43 M12.8@33020,19201.1
NetH5_23: H5.23 M12.13 | length 671.6
  Top Layer w10: H5.23@32603.9,19125 32705,19023.9 32705,18898.9 32823.31,18780.59 32988.02,18780.59 33020,18812.57 M12.13@33020,18838.9
NetH5_24: H5.24 M12.18 | length 896.7
  Top Layer w10: H5.24@32603.9,19025 32603.9,18900 32743.31,18760.59 33218.02,18760.59 33270,18812.57 M12.18@33270,18838.9
NetH6_1: H6.1 M1.5 M2.5 M3.5 M4.5 M5.5 M6.5 M7.5 M8.5 M9.5 M10.5 M11.5 M12.5 | length 20358.9
  Top Layer w10: v1(28595,19880) 28595,19755 28645,19705 M4.5@28645,19663.9 ; v1(28595,20330) 28645,20280 M3.5@28645,20238.9 ; v1(29320,19055) 29320,18930 29370,18880 M6.5@29370,18838.9 ; v1(29320,19505) 29370,19455 M5.5@29370,19413.9 ; v1(29320,20780) 29320,20655 29370,20605 M2.5@29370,20563.9 ; v1(29320,21230) 29370,21180 M1.5@29370,21138.9 ; v1(33170,19105) M12.5@33170,19201.1 ; v1(33170,19585) M11.5@33170,19776.1 ; v1(33170,20830) M8.5@33170,20926.1 ; v1(33170,21310) M7.5@33170,21501.1 v1(33170,21675) ; v1(33895,19930) M10.5@33895,20026.1 ; v1(33895,20410) M9.5@33895,20601.1
  Bottom Layer w10: v1(29320,19055) v1(29320,19505) 29045,19505 29040,19510 29040,20198.75 28983.75,20255 28934.05,20255 28898.9,20219.85 28898.9,19875.47 28808.43,19785 28600,19785 28595,19790 v1(28595,19880) v1(28595,20330) 28595,20405 28655,20465 29550,20465 29635,20550 29635,20656.57 29586.57,20705 29395,20705 v1(29320,20780) ; v1(29320,21230) v1(29320,20780) ; v1(33170,19105) v1@33170,19580 ; v1(33170,19585) 33170,19621.72 33151.72,19640 33014.85,19640 32934.85,19560 32785,19560 32760,19585 32760,19880 33210,20330 33518.14,20330 33655,20193.14 33655,19908.28 33748.28,19815 33851.72,19815 33895,19858.28 v1(33895,19930) v1@33895,20405 ; v1@33170,21305 v1(33170,20830) 33160,20820 33160,20758.43 33116.57,20715 32953.43,20715 32930,20691.57 32930,20658.43 32931.1,20657.33 32931.1,20527.33 33003.43,20455 33711.57,20455 33721.57,20465 33840,20465 v1(33895,20410) ; v1(33170,21675) 33160,21685 32774.85,21685 32394.85,21305 30130.15,21305 29780.15,21655 27947.03,21655 27745,21452.97 27745,21350 H6.1@27825,21270 27825,21115 28165,20775 29315,20775 v1(29320,20780)
NetH6_2: H6.2 M1.2 M1.9 M1.12 M1.19 M2.2 M2.9 M2.12 M2.19 M3.2 M3.9 M3.12 M3.19 M4.2 M4.9 M4.12 M4.19 M5.2 M5.9 M5.12 M5.19 M6.2 M6.9 M6.12 M6.19 M7.2 M7.9 M7.12 M7.19 M8.2 M8.9 M8.12 M8.19 M9.2 M9.9 M9.12 M9.19 M10.2 M10.9 M10.12 M10.19 M11.2 M11.9 M11.12 M11.19 M12.2 M12.9 M12.12 M12.19 | length 23980
  Top Layer w10: M4.2@28495,19663.9 v1(28495,19765) M4.19@28495,20026.1 M3.2@28495,20238.9 v1(28495,20505) M3.19@28495,20601.1 ; M4.9@28845,19663.9 v1(28845,19765) M4.12@28845,20026.1 ; M3.9@28845,20238.9 v1(28845,20505) M3.12@28845,20601.1 ; M6.2@29220,18838.9 v1(29220,18940) M6.19@29220,19201.1 M5.2@29220,19413.9 v1(29220,19680) M5.19@29220,19776.1 ; M2.2@29220,20563.9 v1(29220,20665) M2.19@29220,20926.1 M1.2@29220,21138.9 v1(29220,21405) M1.19@29220,21501.1 ; M6.9@29570,18838.9 v1(29570,18940) M6.12@29570,19201.1 ; M5.9@29570,19413.9 v1(29570,19680) M5.12@29570,19776.1 ; M2.9@29570,20563.9 v1(29570,20665) M2.12@29570,20926.1 ; M1.9@29570,21138.9 v1(29570,21405) M1.12@29570,21501.1 ; M12.12@32970,18838.9 v1(32970,18950) M12.9@32970,19201.1 ; M11.12@32970,19413.9 v1(32970,19680) M11.9@32970,19776.1 ; M8.12@32970,20563.9 v1(32970,20675) M8.9@32970,20926.1 ; M7.12@32970,21138.9 v1(32970,21395) M7.9@32970,21501.1 v1(32970,21595) ; M12.19@33320,18838.9 v1(33320,18950) M12.2@33320,19201.1 M11.19@33320,19413.9 v1(33320,19680) M11.2@33320,19776.1 ; M8.19@33320,20563.9 v1(33320,20675) M8.2@33320,20926.1 M7.19@33320,21138.9 v1(33320,21395) M7.2@33320,21500 ; M10.12@33695,19663.9 v1(33695,19775) M10.9@33695,20026.1 ; M9.12@33695,20238.9 v1(33695,20495) M9.9@33695,20601.1 ; M10.19@34045,19663.9 v1(34045,19775) M9.19@34045,20238.9 v1(34045,20495) M9.2@34045,20601.1
  Bottom Layer w10: H6.2@27825,21370 27835,21380 29195,21380 v1(29220,21405) v1(29570,21405) 29973.58,21405 30133.58,21245 32391.42,21245 32741.42,21595 v1(32970,21595) ; v1(28495,19765) v1(28845,19765) 28918.9,19838.9 28918.9,20211.57 28942.33,20235 28975.47,20235 29020,20190.47 29020,19501.72 29220,19301.72 v1(29220,18940) v1(29570,18940) ; v1(28495,20505) v1(28845,20505) 29060,20505 v1(29220,20665) v1(29570,20665) ; v1(29220,19680) v1(29570,19680) ; v1(32970,18950) v1(33320,18950) ; v1(32970,20675) v1(33320,20675) 33470,20525 33665,20525 v1(33695,20495) v1(34045,20495) ; v1(32970,21395) v1(33320,21395) ; v1(33320,19680) v1(32970,19680) 32905,19615 32800,19615 32800,19795 33280,20275 33516.57,20275 33615,20176.57 33615,19855 v1(33695,19775) v1(34045,19775)
NetH6_3: H6.3 M1.4 M1.7 M1.14 M1.17 M2.4 M2.7 M2.14 M2.17 M3.4 M3.7 M3.14 M3.17 M4.4 M4.7 M4.14 M4.17 M5.4 M5.7 M5.14 M5.17 M6.4 M6.7 M6.14 M6.17 M7.4 M7.7 M7.14 M7.17 M8.4 M8.7 M8.14 M8.17 M9.4 M9.7 M9.14 M9.17 M10.4 M10.7 M10.14 M10.17 M11.4 M11.7 M11.14 M11.17 M12.4 M12.7 M12.14 M12.17 | length 26410.6
  Top Layer w10: M4.4@28595,19663.9 28595,19690.23 28555,19730.23 28555,19896.57 28595,19936.57 M4.17@28595,20026.1 28595,20085 28745,20085 M4.14@28745,20026.1 v1(28745,19930) M4.7@28745,19663.9 ; M3.17@28595,20601.1 28595,20386.57 28555,20346.57 28555,20305.23 28595,20265.23 M3.4@28595,20238.9 28595,20205 28635,20165 28705,20165 28745,20205 M3.7@28745,20238.9 v1(28745,20380) M3.14@28745,20601.1 ; M6.4@29320,18838.9 29320,18865.23 29280,18905.23 29280,19071.57 29320,19111.57 M6.17@29320,19201.1 29320,19280 29470,19280 M6.14@29470,19201.1 v1(29470,19105) M6.7@29470,18838.9 ; M5.4@29320,19413.9 29320,19440.23 29280,19480.23 29280,19521.57 29320,19561.57 M5.17@29320,19776.1 29320,19830 29340,19850 29450,19850 29470,19830 M5.14@29470,19776.1 v1(29470,19555) M5.7@29470,19413.9 ; M1.4@29320,21138.9 29320,21165.23 29280,21205.23 29280,21246.57 29320,21286.57 M1.17@29320,21501.1 v1(29320,21600) 29410,21600 29470,21540 M1.14@29470,21501.1 v1(29470,21280) M1.7@29470,21138.9 ; M12.14@33070,18838.9 v1(33070,19105) M12.7@33070,19201.1 33070,19240 33095,19265 33200,19265 33220,19245 M12.4@33220,19227.43 ; M11.14@33070,19413.9 v1(33070,19580) M11.7@33070,19776.1 33070,19802.43 33101.98,19834.41 33188.02,19834.41 33220,19802.43 M11.4@33220,19776.1 33220,19685.55 33275,19630.55 33275,19520 33220,19465 M11.17@33220,19413.9 ; M8.7@33070,20926.1 v1(33070,20830) M8.14@33070,20563.9 33070,20520 33095,20495 33195,20495 33220,20520 M8.17@33220,20563.9 33220,20590.23 33260,20630.23 33260,20795.55 33220,20835.55 M8.4@33220,20926.1 ; v1(33070,21635) M7.7@33070,21501.1 v1(33070,21305) M7.14@33070,21138.9 33070,21112.57 33101.98,21080.59 33188.02,21080.59 33220,21112.57 M7.17@33220,21138.9 33220,21165.23 33275,21220.23 33275,21355.55 33220,21410.55 M7.4@33220,21501.1 ; M12.17@33220,18838.9 33220,18865.23 33260,18905.23 33260,19070.55 33220,19110.55 M12.4@33220,19201.1 ; M10.14@33795,19663.9 v1(33795,19930) 33795,20060 33825,20090 33920,20090 33945,20065 M10.4@33945,20052.43 ; M9.14@33795,20238.9 v1(33795,20405) M9.7@33795,20601.1 33795,20635 33830,20670 33915,20670 33945,20640 M9.4@33945,20601.1 33945,20510.55 34000,20455.55 34000,20330 33945,20275 M9.17@33945,20238.9 ; M10.17@33945,19663.9 33945,19690.23 33985,19730.23 33985,19895.55 33945,19935.55 M10.4@33945,20026.1 ; 29280,20630.23 29320,20590.23 M2.4@29320,20563.9 29320,20537.57 29367.57,20490 29422.43,20490 29470,20537.57 M2.7@29470,20563.9 v1(29470,20830) M2.14@29470,20926.1 29470,21005 29320,21005 M2.17@29320,20926.1 29320,20836.57 29280,20796.57 29280,20630.23
  Bottom Layer w10: H6.3@27825,21470 27955,21600 v1(29320,21600) 29806.86,21600 30131.86,21275 32393.14,21275 32768.14,21650 33055,21650 v1(33070,21635) ; v1(28745,19930) v1(28745,20380) 29100,20380 ; v1(29470,19105) v1(29470,19555) 29385,19640 29180,19640 29100,19720 29100,20380 ; v1(29470,21280) v1(29470,20830) 29535,20765 29611.42,20765 29695,20681.42 29695,20525.15 29574.85,20405 29451.42,20405 29426.42,20380 29100,20380 ; 32880,20405 v1(33795,20405) v1(33795,19930) ; v1(33070,19105) 33070,19515 ; v1(33070,19580) 33070,19515 ; v1(33070,21305) v1(33070,20830) 32910,20830 32890,20810 32890,20581.57 32891.1,20580.47 32891.1,20416.1 32690,20215 32690,19530 32705,19515 33070,19515
NetM1_1: M1.1 U52.15 | length 697.1
  Top Layer w10: U52.15@28500.32,21205 29075,21205 29141.1,21138.9 M1.1@29170,21138.9
NetM1_10: M1.10 U52.14 | length 1387.9
  Top Layer w10: U52.14@28505.32,21150 v1(29020,21150) ; M1.10@29620,21138.9 v1(29683.9,21138.9)
  Bottom Layer w10: v1(29020,21150) 29190,21320 29486.57,21320 29667.67,21138.9 v1(29683.9,21138.9)
NetM1_11: M1.11 U52.13 | length 1686.2
  Top Layer w10: v1(28495,21450) 28495,21323.06 28444.96,21273.02 28444.96,21120.04 28460,21105 U52.13@28500.32,21105 ; M1.11@29620,21501.1 v1(29683.9,21501.1)
  Bottom Layer w10: v1(28495,21450) 29632.8,21450 v1(29683.9,21501.1)
NetM1_20: M1.20 U52.12 | length 1205.2
  Top Layer w10: U52.12@28500.32,21055 28465,21055 28424.96,21095.04 28424.96,21436.53 28489.53,21501.1 M1.20@29170,21501.1